# EAGLE board shema (EAGLE 7.3.0)
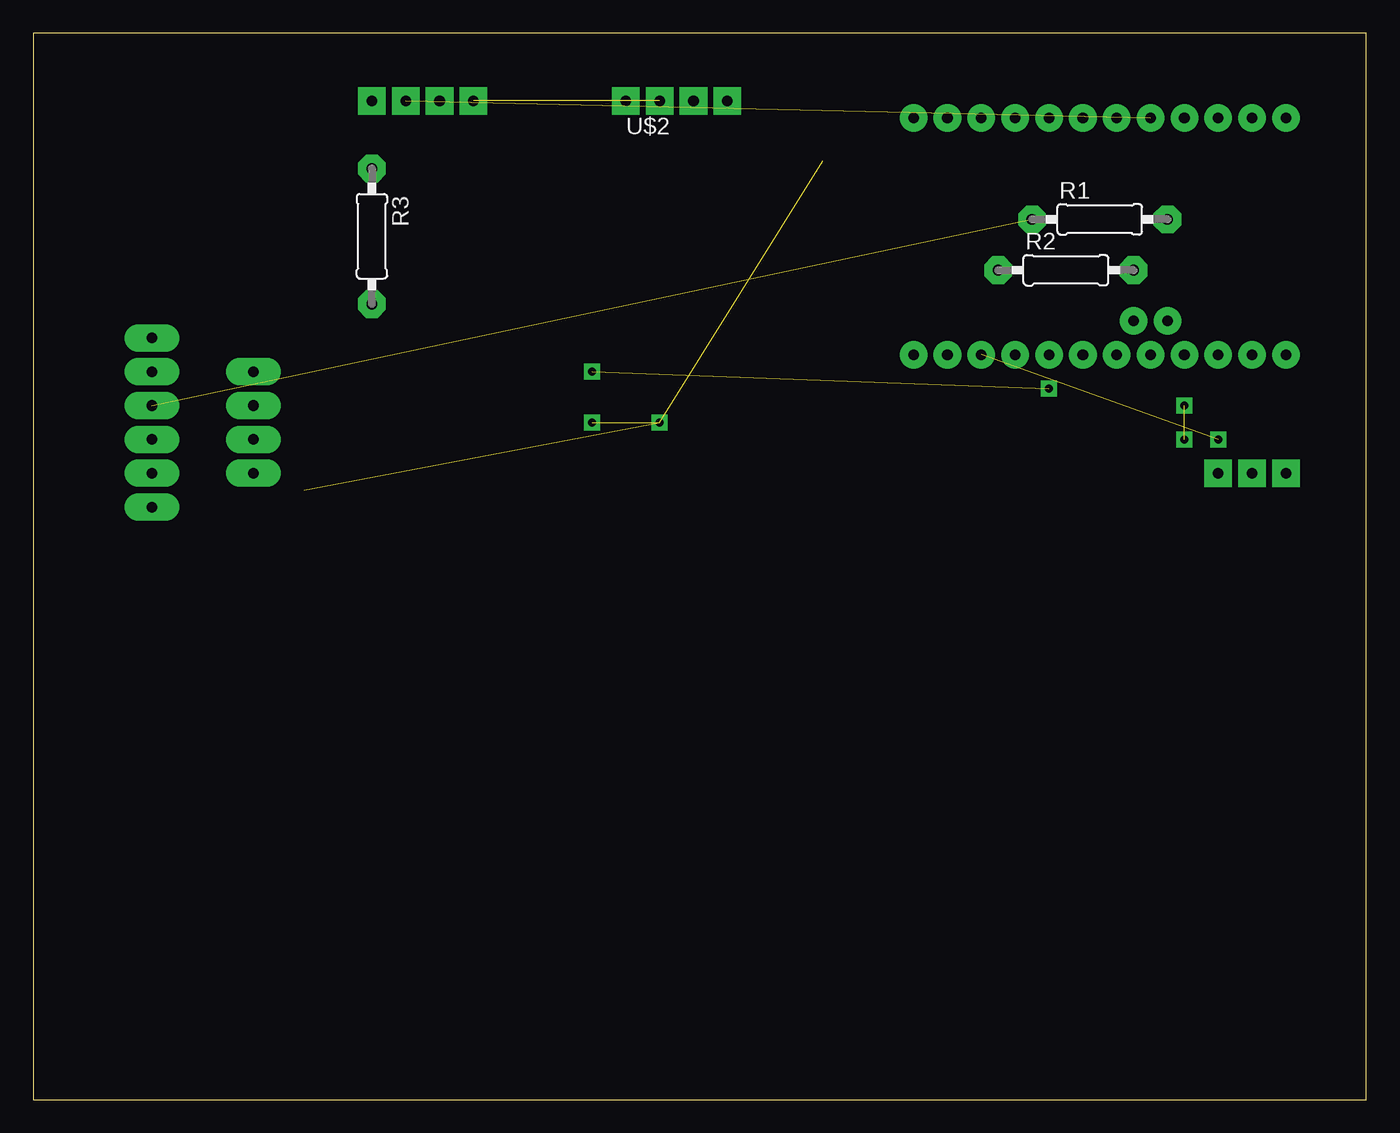
[diagram p0: board, top side]
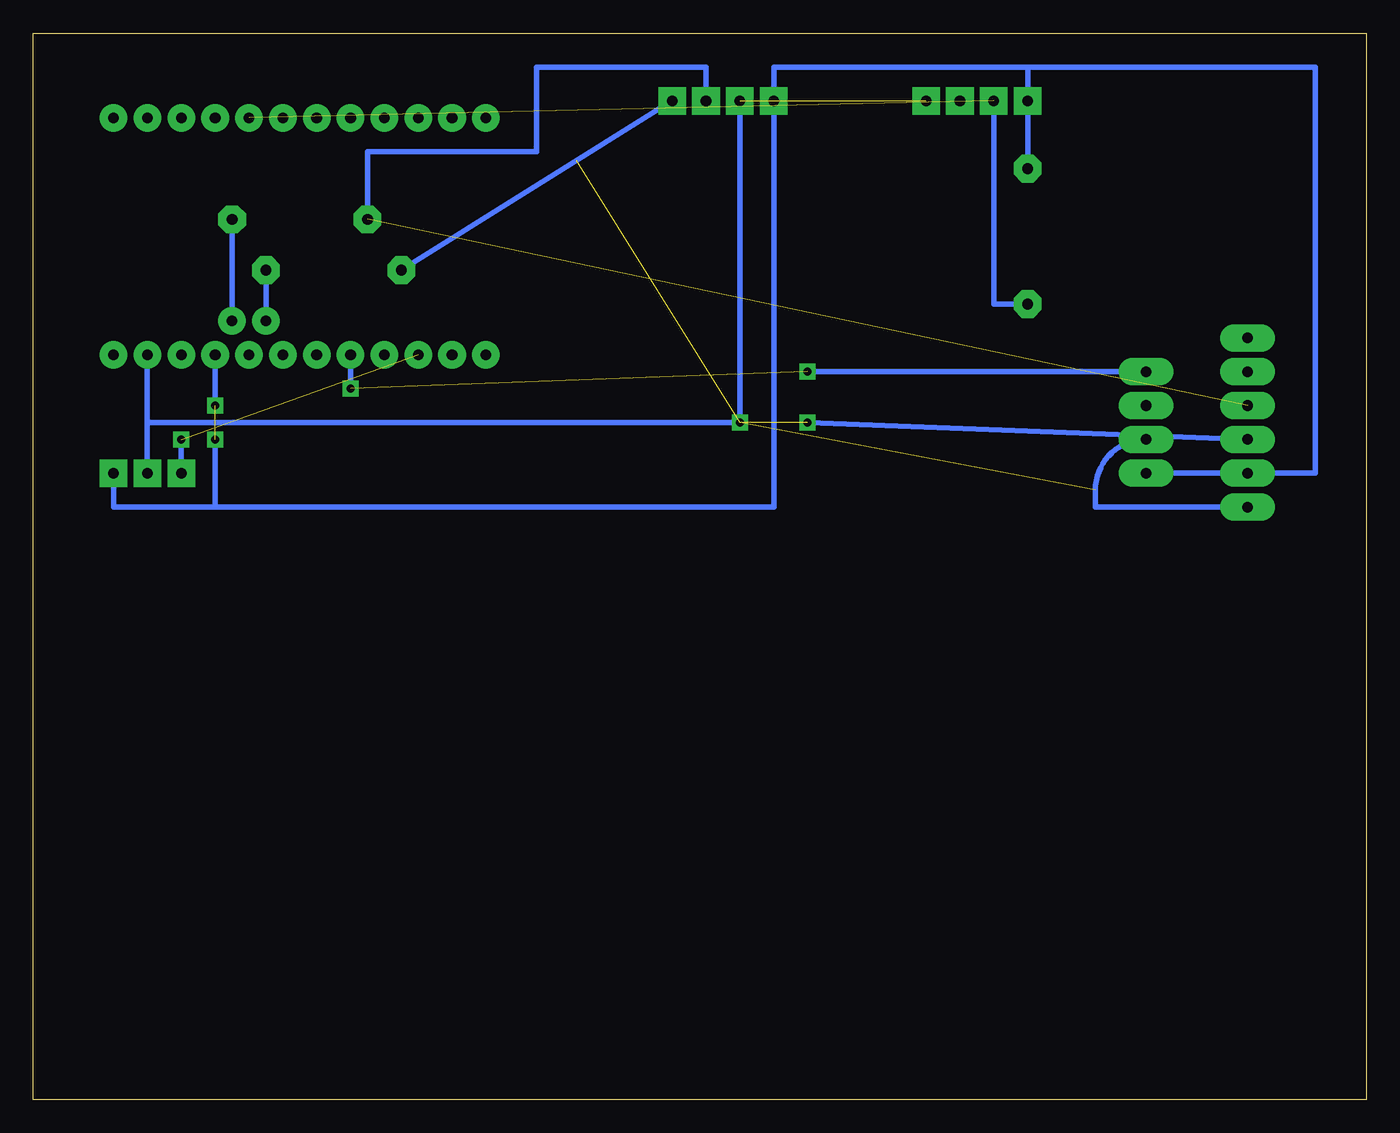
[diagram p1: board, bottom side, seen from below]

Size 100 x 80 mm. Coordinates in mm from the lower left corner, seen from the top.
Outline: 0,0 100,0 100,80 0,80 0,0
Copper layers (1*16): Top 0.035mm / dielectric 1.5mm / Bottom 0.035mm
Design rules "default": minimum track width 10mil, minimum drill 32mil, track to track 12mil, track to pad 12mil, pad to pad 12mil, via to via 12mil, smd to smd 8mil, copper to edge 40mil, drill to drill 40mil, minimum pad ring 25mil, minimum via ring 12mil, stop-mask expansion 4mil, vias tented up to drill 0mil, thermal gap 20mil

## Footprints (pad centres in the part's own frame; a part is rotated, then mirrored left to right if it is on the bottom)
0207/10 = drill 0.813 octagon: 1 -5.08,0; 2 5.08,0
ARDUINO-MINI-PRO = drill 0.8: 2 5.08,5.08; 3 2.54,5.08; 4 0,5.08; 5 -2.54,5.08; 6 -5.08,5.08; 7 -7.62,5.08; 8 -10.16,5.08; 9 -12.7,5.08; 10 -12.7,-12.7; 11 -10.16,-12.7; 12 -7.62,-12.7; 13 -5.08,-12.7; A0 -2.54,-12.7; A1 0,-12.7; A2 2.54,-12.7; A3 5.08,-12.7; A4 3.81,-10.16; A5 6.35,-10.16; GND 12.7,-12.7; GND1 7.62,5.08; RAW 15.24,-12.7; RST 10.16,-12.7; RST1 10.16,5.08; RXI1 12.7,5.08; TXO1 15.24,5.08; VCC 7.62,-12.7
128X64-I2C-OLED = drill 0.8 square: GND -2.54,0; SCL 0,0; SDA 2.54,0; VCC -5.08,0
RTC-DC3231 = drill 0.8 long: 32K 0,7.62; GND 0,-5.08; SCL 0,2.54; SDA 0,0; SQW 0,5.08; VCC 0,-2.54
FC-28 = drill 0.8 long: A0 0,-5.08; D0 0,-2.54; GND 0,0; VCC 0,2.54
DHT22 = drill 0.8 square: - 0,0; DATA -2.54,0; GND 2.54,0; VCC -5.08,0
RELAY = drill 0.8 square: GND 0,0; IN 0,2.54; VCC 0,-2.54

## Placement (x,y rotation side)
R1  [0207/10]  80.01,66.04 0 top
R2  10k  [0207/10]  77.47,62.23 0 top
R3  10k  [0207/10]  25.4,64.77 270 top
U$1  ARDIONO-MINI-PRO  [ARDUINO-MINI-PRO]  78.74,68.58 0 top
U$2  128X64-I2C-OLED  [128X64-I2C-OLED]  49.53,74.93 0 top
U$3  RTC-DC3231  [RTC-DC3231]  8.89,49.53 0 top
U$4  FC-28Стандартный  [FC-28]  16.51,49.53 180 top
U$5  DHT22  [DHT22]  30.48,74.93 0 top
U$6  RELAY  [RELAY]  91.44,46.99 90 top

## Library data of the parts
R1-R3 = resistor
U$1-U$6 = MyComp

## Nets
+5V: R3.1 U$1.VCC U$2.VCC U$3.VCC U$4.VCC U$5.VCC U$6.VCC
+12V: U$1.RAW
A0: U$1.A0 U$4.A0
D0: U$4.D0
D2: R3.2 U$1.2 U$5.DATA
D12: U$1.12 U$6.IN
GND: U$1.GND U$2.GND U$3.GND U$4.GND U$5.GND U$6.GND
GND1: U$1.GND1
N$1: R1.2 U$1.A5
N$2: R2.2 U$1.A4
SCL: R1.1 U$2.SCL U$3.SCL
SDA: R2.1 U$2.SDA U$3.SDA

## Tracks (layer width: path | path; a pad name or v marks a point on that pad's centre or on a via)
+5V  (1 unrouted)
  Bottom 0.406: U$1.VCC 86.36,52.07 | 86.36,44.45 44.45,44.45 U$2.VCC 44.45,77.47 25.4,77.47 | 86.36,44.45 86.36,49.53 | U$4.VCC U$3.VCC 3.81,46.99 3.81,77.47 25.4,77.47 | 25.4,77.47 U$5.VCC R3.1 | U$6.VCC 93.98,44.45 86.36,44.45
A0  (via drill 0.6)  (1 unrouted)
  Bottom 0.406: U$1.A0 v76.2,53.34 | U$4.A0 v41.91,54.61
D2  (1 unrouted)
  Bottom 0.406: U$5.DATA 27.94,59.69 R3.2
D12  (1 unrouted)
  Bottom 0.406: U$6.IN 88.9,49.53
GND  (via drill 0.6)  (2 unrouted)
  Bottom 0.406: U$1.GND 91.44,50.8 | 91.44,50.8 v46.99,50.8 U$2.GND | U$3.GND 20.32,44.45 20.32,45.72 arc90 U$4.GND | U$6.GND 91.44,50.8
N$1
  Bottom 0.406: U$1.A5 R1.2
N$2
  Bottom 0.406: U$1.A4 R2.2
N$3  (via drill 0.6)
  other vias: 86.36,52.07
N$4  (via drill 0.6)
  other vias: 86.36,49.53
N$5  (via drill 0.6)
  other vias: 88.9,49.53
N$6  (via drill 0.6)
  other vias: 41.91,50.8
SCL  (1 unrouted)
  Bottom 0.406: R1.1 74.93,71.12 62.23,71.12 62.23,77.47 49.53,77.47 U$2.SCL
SDA  (2 unrouted)
  Bottom 0.406: R2.1 U$2.SDA | U$3.SDA 41.91,50.8